# EAGLE board power board (EAGLE 9.6.2)
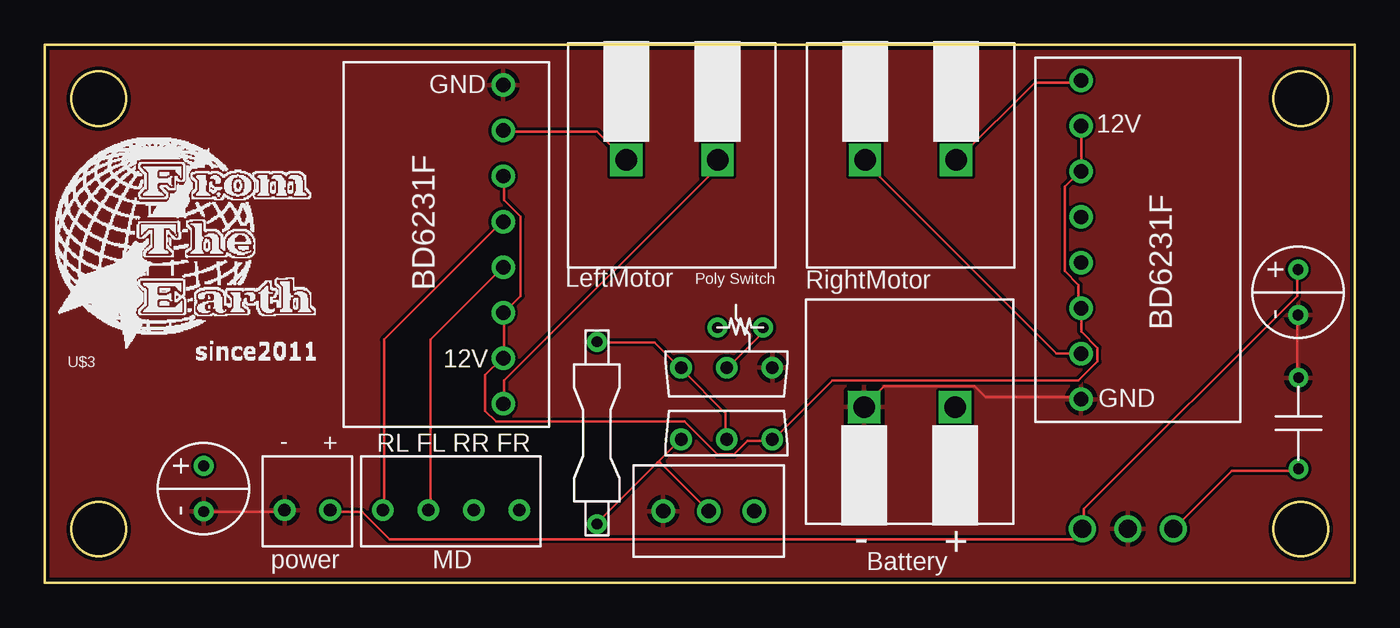
[diagram p0: board, top side]
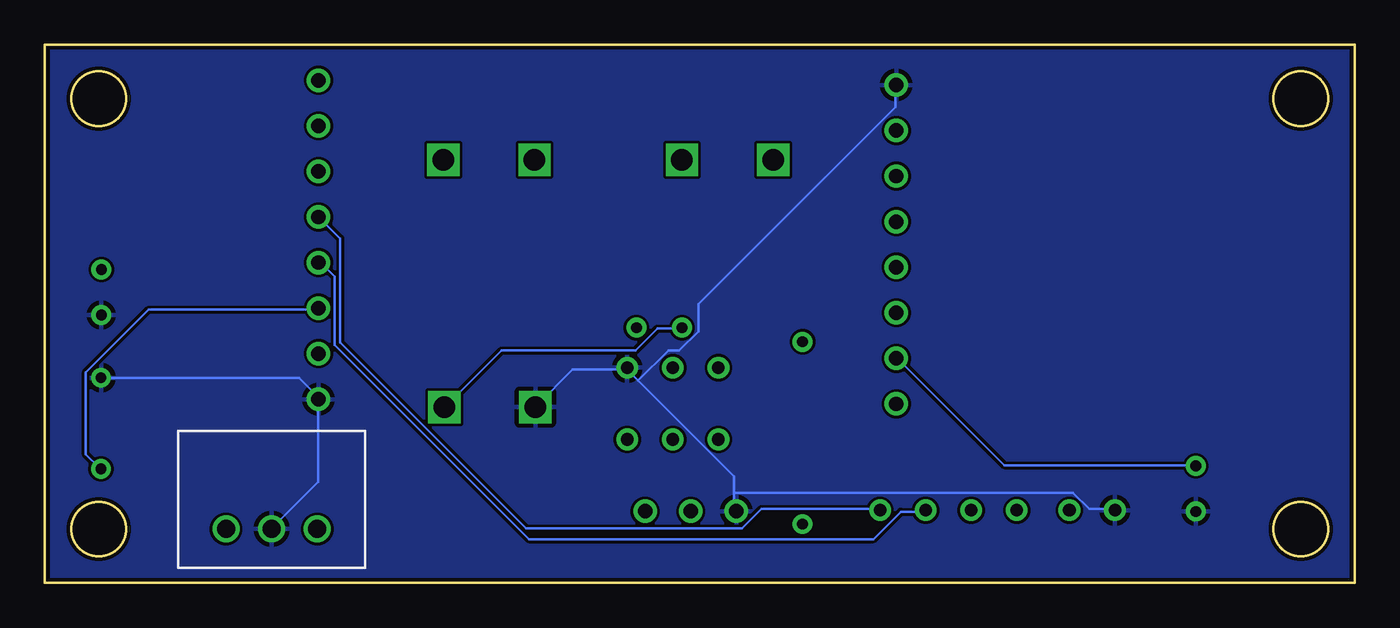
[diagram p1: board, bottom side, seen from below]

Size 73 x 30 mm. Coordinates in mm from the lower left corner, seen from the top.
Outline: 0,0 0,30 73,30 73,0 0,0
Outline: circle at 3,3 radius 1.5
Outline: circle at 3,27 radius 1.5
Outline: circle at 70,27 radius 1.5
Outline: circle at 70,3 radius 1.5
Copper layers (1*16): Top 0.035mm / dielectric 1.5mm / Bottom 0.035mm
Design rules "PCBGoGo": minimum track width 6mil, minimum drill 0.2mm, track to track 6mil, track to pad 6mil, pad to pad 6mil, via to via 6mil, smd to smd 6mil, copper to edge 0.2mm, drill to drill 6mil, minimum pad ring 10mil, minimum via ring 8mil, stop-mask expansion 4mil, vias tented up to drill 0mil, thermal gap 10mil

## Footprints (pad centres in the part's own frame; a part is rotated, then mirrored left to right if it is on the bottom)
CAPACITOR-ELECTROLYTIC_1 = drill 0.6: AN -1.27,0; KS 1.27,0
CAPACITOR-CERAMICC_1 = drill 0.6: 1 -2.54,0; 2 2.54,0
2PIN = drill 0.7: 1 -1.27,0; 2 1.27,0
4PIN = drill 0.7: 1 -3.81,0; 2 -1.27,0; 3 1.27,0; 4 3.81,0
M78AR033-1 = drill 1: GND 0,0; VIN 2.54,0; VOUT -2.54,0
BD6231F_DIP_1 = drill 0.8: FIN -1.27,0; GND 8.89,0; OUT1 -8.89,0; OUT2 6.35,0; RIN 1.27,0; VCC1 -6.35,0; VCC2 -3.81,0; VREF 3.81,0
POLYSWITCH = drill 0.6: 1 -1.27,0; 2 1.27,0
REGISTER = drill 0.6: A -5.08,0; B 5.08,0
SLIDE-SW = drill 0.8: CENTER 0,0; LEFT -2.54,0; RIGHT 2.54,0
TERMINAL_SLOPED_2PIN = drill 1.2 square: 1 -2.54,0; 2 2.54,0
2SJ681 = drill 0.7: DRAIN 0,0; GATE 2.54,0; SOURCE -2.54,0

## Placement (x,y rotation side)
C1  [CAPACITOR-ELECTROLYTIC_1]  69.85,16.2 90 top
C2  [CAPACITOR-CERAMICC_1]  69.87,8.9 90 top
C3  [CAPACITOR-ELECTROLYTIC_1]  8.85,5.25 90 top
CONN1  [2PIN]  14.63,4.05 180 top
CONN2  [4PIN]  22.64,4.05 180 top
M78AR033-1  M78AR033-1  [M78AR033-1]  60.36,3.01 180 bottom
MD1  BD6231F_DIP_1  [BD6231F_DIP_1]  57.75,19.13 270 top
MD2  BD6231F_DIP_1  [BD6231F_DIP_1]  25.55,18.87 90 top
PS1  ~1.0A  [POLYSWITCH]  38.76,14.23 0 top
R1  100K  [REGISTER]  30.77,8.36 90 top
SW1  [SLIDE-SW]  37,4 180 top
TM1  [TERMINAL_SLOPED_2PIN]  34.95,23.59 0 top
TM2  [TERMINAL_SLOPED_2PIN]  48.25,23.59 0 top
TM3  [TERMINAL_SLOPED_2PIN]  48.2,9.8 180 top
U$1  2SJ681-PCH  [2SJ681]  38,12 0 top
U$2  2SJ681-PCH  [2SJ681]  38,8 180 top
U$3  [LOGO]  0,11 0 top

## Library data of the parts
C1 = normal capacitor; C1: 3.3uF
C2 = normal capacitor; C1: 0.1uF
C3 = normal capacitor; C2: 100uF
CONN1 CONN2 = 171822 connecter
M78AR033-1 = M78AR
MD1 MD2 = MD
PS1 = Poly Switch
R1 = normal register; R1: 100K
SW1 = Switches
TM1 TM2 = TerminalBrock
TM3 = TerminalBrock; TERMINAL: 11.1V
U$1 U$2 = mosfet
U$3 = logo

## Nets
+5V: C1.KS CONN1.1 M78AR033-1.VOUT
+12V: C2.1 C3.KS M78AR033-1.VIN MD1.VCC1 MD1.VCC2 MD1.VREF MD2.VCC1 MD2.VCC2 MD2.VREF U$2.SOURCE
FIN_L: CONN2.3 MD2.FIN
FIN_R: CONN2.1 MD1.FIN
GND: C1.AN C2.2 C3.AN CONN1.2 M78AR033-1.GND MD1.GND MD2.GND SW1.RIGHT TM3.2 U$1.GATE
N$1: PS1.2 U$1.DRAIN
N$2: R1.B U$1.SOURCE U$2.DRAIN
N$3: R1.A SW1.CENTER U$2.GATE
N$4: PS1.1 TM3.1
OUT1_L: MD2.OUT1 TM1.2
OUT1_R: MD1.OUT1 TM2.2
OUT2_L: MD2.OUT2 TM1.1
OUT2_R: MD1.OUT2 TM2.1
RIN_L: CONN2.4 MD2.RIN
RIN_R: CONN2.2 MD1.RIN

## Tracks (layer width: path | path; a pad name or v marks a point on that pad's centre or on a via)
+5V
  Top 0.152: C1.KS 69.8,17.37 69.8,16 57.91,4.12 57.91,3.05 M78AR033-1.VOUT 57.76,2.9 57.3,2.44 19.2,2.44 17.68,3.96 16,3.96 CONN1.1
+12V
  Top 0.152: MD1.VCC1 57.76,25.45 57.76,23.01 MD1.VCC2 57.61,22.86 56.84,22.1 56.84,17.37 57.61,16.61 57.61,15.39 MD1.VREF 57.76,15.24 57.76,14.02 58.67,13.11 58.67,12.34 57.61,11.28 43.89,11.28 40.69,8.08 U$2.SOURCE 40.54,7.92 39.17,7.92 38.41,7.16 37.49,7.16 35.66,8.99 25.15,8.99 24.54,9.6 24.54,11.58 25.45,12.5 MD2.VCC1 25.6,12.65 25.6,14.94 MD2.VCC2 25.6,15.09 26.52,16 26.52,20.42 25.6,21.34 25.6,22.55 MD2.VREF | C2.1 69.8,6.25 66.14,6.25 62.94,3.05 M78AR033-1.VIN
  Bottom 0.152: MD1.VREF 57.76,15.24 67.21,15.24 70.71,11.73 70.71,7.16 69.95,6.4 C2.1 | C3.KS 8.99,6.55 19.51,6.55 25.45,12.5 MD2.VCC1
FIN_L
  Top 0.152: CONN2.3 21.49,4.12 21.49,13.56 25.45,17.53 MD2.FIN
FIN_R
  Bottom 0.152: CONN2.1 26.52,4.12 33.07,4.12 34.14,3.05 46.18,3.05 56.54,13.41 56.54,19.2 57.61,20.27 MD1.FIN
GND
  Top 0.152: C1.AN 69.8,14.78 69.8,11.58 C2.2 | C3.AN 8.99,3.96 13.26,3.96 CONN1.2 | MD1.GND 57.61,10.36 52.43,10.36 51.82,10.97 46.79,10.97 45.72,9.91 TM3.2
  Bottom 0.152: M78AR033-1.GND 60.35,3.05 57.76,5.64 57.76,10.21 MD1.GND 57.76,10.36 58.83,11.43 69.8,11.43 C2.2 | TM3.2 45.57,9.91 43.59,11.89 40.69,11.89 U$1.GATE 40.54,11.89 39.93,11.28 | 34.59,5.03 34.59,5.94 39.93,11.28 | 34.59,5.03 34.59,4.12 SW1.RIGHT | 39.93,11.28 38.25,12.95 37.64,12.95 36.58,14.02 36.58,15.54 25.6,26.52 25.6,27.74 MD2.GND | 34.59,5.03 15.7,5.03 14.78,4.12 13.41,4.12 CONN1.2
  pour Top: -1,31 -1,-1 74,-1 74,31
  pour Bottom: -1,31 -1,-1 74,-1 74,31
N$1
  Top 0.152: PS1.2 39.93,14.17 39.93,13.87 38.1,12.04 U$1.DRAIN
N$2
  Top 0.152: R1.B 30.79,13.41 33.98,13.41 35.36,12.04 U$1.SOURCE 35.51,11.89 37.95,9.45 37.95,8.08 U$2.DRAIN
N$3
  Top 0.152: 34.14,6.71 35.36,7.92 U$2.GATE | 34.14,6.71 30.79,3.35 R1.A | 34.14,6.71 34.29,6.71 36.88,4.12 SW1.CENTER
N$4
  Bottom 0.152: PS1.1 37.49,14.17 38.86,14.17 40.08,12.95 47.55,12.95 50.6,9.91 TM3.1
OUT1_L
  Top 0.152: MD2.OUT1 25.6,10.06 25.6,11.28 37.34,23.01 37.34,23.47 TM1.2
OUT1_R
  Top 0.152: MD1.OUT1 57.61,27.89 55.17,27.89 50.9,23.62 TM2.2
OUT2_L
  Top 0.152: MD2.OUT2 25.6,25.15 30.79,25.15 32.31,23.62 TM1.1
OUT2_R
  Top 0.152: MD1.OUT2 57.61,12.8 56.39,12.8 45.72,23.47 TM2.1
RIN_L
  Top 0.152: CONN2.4 18.9,4.12 18.9,13.56 25.45,20.12 MD2.RIN
RIN_R
  Bottom 0.152: CONN2.2 23.93,3.96 25.3,3.96 26.82,2.44 46.02,2.44 56.84,13.26 56.84,17.07 57.61,17.83 MD1.RIN

## Text on the board
tPlace: GND | 12V | LeftMotor | RightMotor | 12V | GND | - | + | RL FL RR FR | - | + | power | MD | Battery